# Altium PCB PCB1.PcbDoc
Units mil, origin at the board's own origin, x right, y up, seen from the top; angles counter-clockwise.
Board outline 6000 x 4000 mil, 2 copper layers (Top Layer, Bottom Layer); 35 components, 58 nets, 174 pads, 0 vias.
Unrouted connection lines stored in the file: 95.
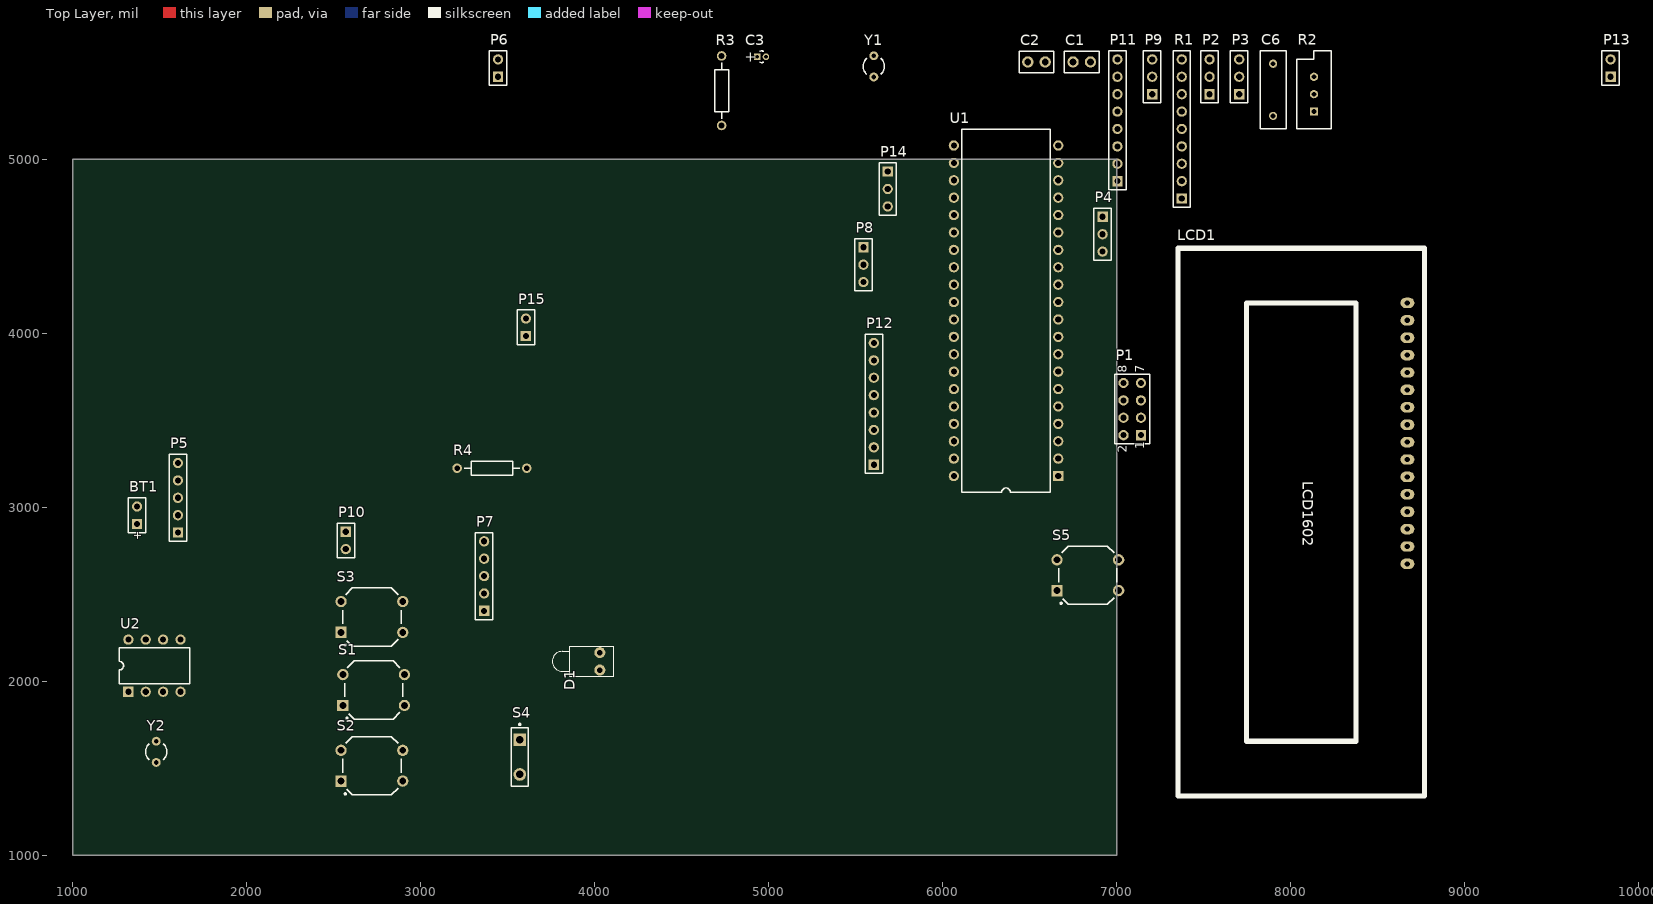
[diagram p0: Top Layer view]
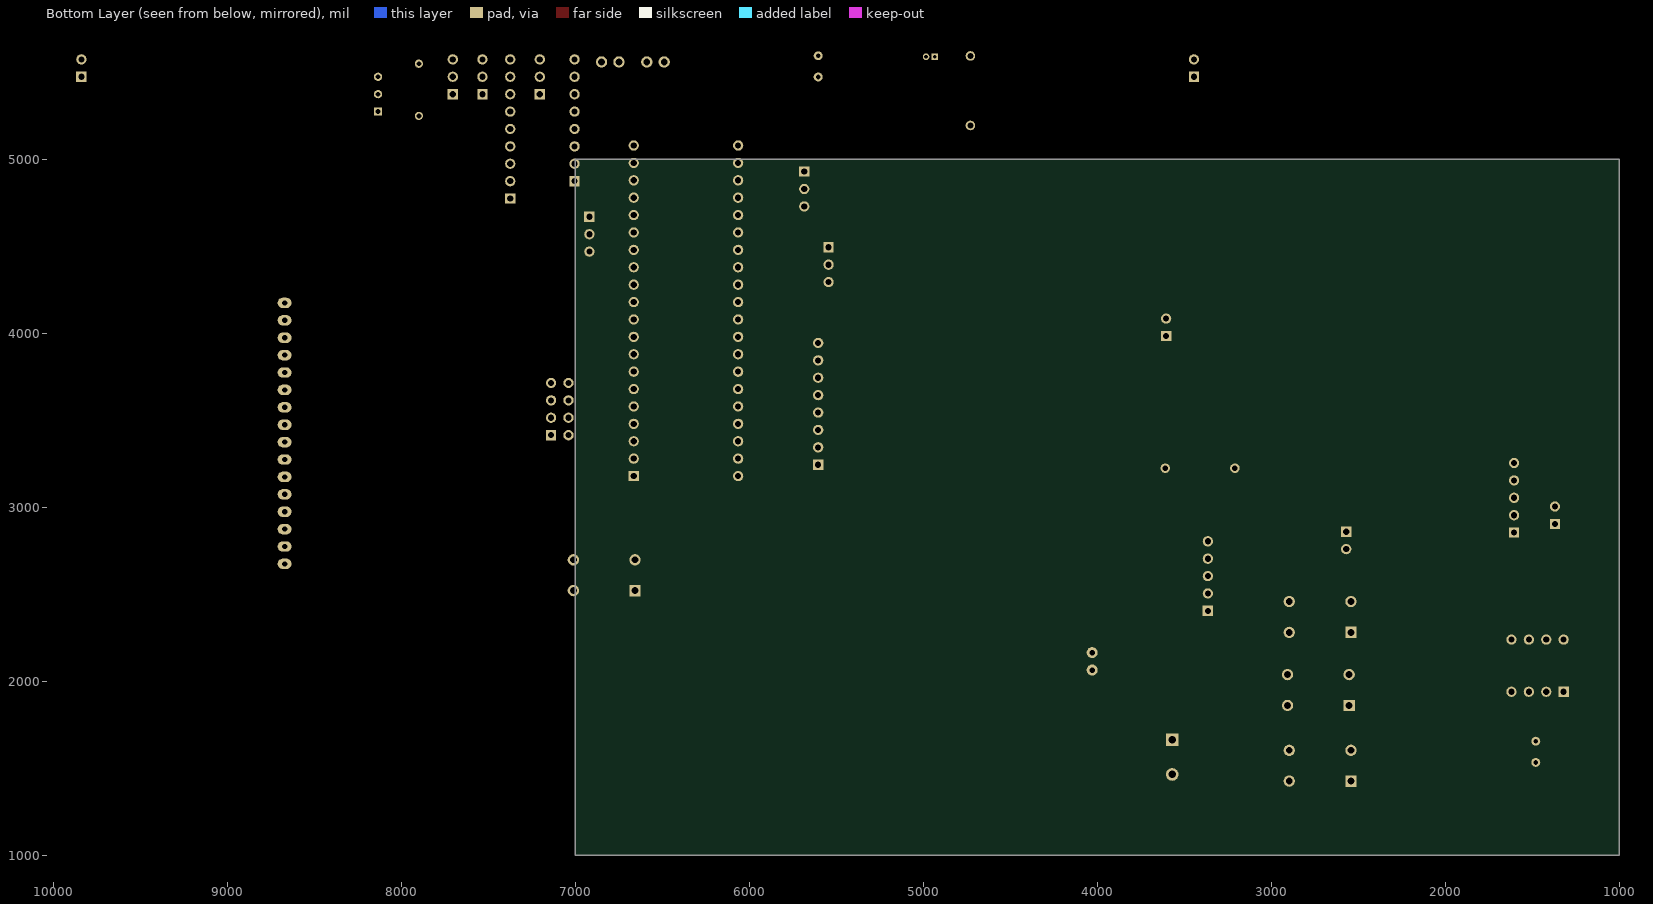
[diagram p1: Bottom Layer view, seen from below]

## Layer stack, top to bottom
Top Layer: signal copper 1.4
Dielectric: dielectric 12.6, FR-4, Dk 4.8
Bottom Layer: signal copper 1.4

## Board outline
1000,1000 7000,1000 7000,5000 1000,5000

## Design rules (kind name [scope] priority, off if disabled: settings)
Clearance [All] p1: gap=10
PolygonConnect [All] p1: connectstyle=Relief reliefconductorwidth=10 reliefentries=4 polygonreliefangle="90 Angle"
RoutingVias [All] p1: holewidth=28 width=50 viastyle="Through Hole" minholewidth=28 minwidth=50 maxholewidth=28 maxwidth=50
SilkscreenOverComponentPads [All] p1: minsilkscreentomaskgap=10
SolderMaskExpansion [All] p1: expansion=4
Width [All] p1: maxlimit=10 minlimit=10 preferedwidth=10
27 further rules are at their usual default settings.

## Components (designator, comment, footprint, x,y, rotation, side; value= is the part's Value field where it differs from the comment)
BT1 "Battery" BAT-2 1370,2955 r90 top
C1 "Cap" CAPR2.54-5.1x3.2 6800,5560 r0 top
C2 "Cap" CAPR2.54-5.1x3.2 6540,5560 r0 top
C3 "Cap Pol1" CAPPR1.27-1.7x2.8 4960,5590 r0 top
C6 "Cap" RAD-0.3 7900,5400 r90 top
D1 "LED" LED-1 4030,2115 r180 top
LCD1 "LCD1602" 1602LCD 8770,4490 r270 top
P1 "Header 4X2" HDR2X4 7140,3415 r90 top
P2 "Header 3" HDR1X3 7535,5375 r90 top
P3 "Header 3" HDR1X3 7705,5375 r90 top
P4 "Header 3" HDR1X3 6920,4670 r270 top
P5 "Header 5" HDR1X5 1605,2855 r90 top
P6 "Header 2" HDR1X2 3445,5475 r90 top
P7 "Header 5" HDR1X5 3365,2405 r90 top
P8 "Header 3" HDR1X3 5545,4495 r270 top
P9 "Header 3" HDR1X3 7205,5375 r90 top
P10 "Header 2" HDR1X2 2570,2860 r270 top
P11 "Header 8" HDR1X8 7005,4875 r90 top
P12 "Header 8" HDR1X8 5605,3245 r90 top
P13 "Header 2" HDR1X2 9840,5475 r90 top
P14 "Header 3" HDR1X3 5685,4930 r270 top
P15 "Header 2" HDR1X2 3605,3985 r90 top
R1 "res-p" HDR1X9 7375,4775 r90 top
R2 "RPot" VR5 8135,5375 r90 top
R3 "Res2" AXIAL-0.4 4730,5395 r90 top
R4 "Res2" AXIAL-0.4 3410,3225 r180 top
S1 "SW" SW/PB-V4/H7.1 2730,1950 r0 top
S2 "SW" SW/PB-V4/H7.1 2720,1515 r0 top
S3 "SW" SW/PB-V4/H7.1 2720,2370 r0 top
S4 "SW-SPST" SPST-2 3570,1565 r270 top
S5 "SW-PB" SW/PB-V4/H7.1 6835,2610 r0 top
U1 "P89C51X2BN" SOT129-1 6365,4130 r90 top
U2 "DS1302" DIP8 1470,2090 r0 top
Y1 "XTAL" BCY-W2/D3.1 5605,5535 r0 top
Y2 "XTAL" BCY-W2/D3.1 1480,1595 r0 top

## Footprints (in the part's own frame and the unit in brackets; to place one, negate y for a bottom-side part, rotate by r counter-clockwise, add the part's x,y. Pads: shape width x height; smd on the part's side, far side on the other; paste and mask are expansions set on the pad)
1602LCD [mil] "LCD module 16*2 c"
  oval 60x80 hole 30: 1(314.96,-98.43) 2(414.96,-98.43) 3(514.96,-98.43) 4(614.96,-98.43) 5(714.96,-98.43) 6(814.96,-98.43) 7(914.96,-98.43) 8(1014.96,-98.43) 9(1114.96,-98.43) 10(1214.96,-98.43) 11(1314.96,-98.43) 12(1414.96,-98.43) 13(1514.96,-98.43) 14(1614.96,-98.43) 15(1714.96,-98.43) 16(1814.96,-98.43)
  silkscreen extent 0,-1417 3150,0
AXIAL-0.4 [mm] "Resistor; 2 Le"
  round 1.4 hole 0.85: 1(-5.08,0) 2(5.08,0)
  silkscreen extent -4.06,-1.02 4.06,1.02
BAT-2 [mm] "Multicell Battery; 2 Le"
  rect 1.5x1.5 hole 0.9: 1(-1.27,0)
  round 1.5 hole 0.9: 2(1.27,0)
  silkscreen extent -2.54,-1.27 2.54,1.27
BCY-W2/D3.1 [mm] "Crystal, Thru-Hole; 2 Leads; Body 3.1 x 8.2 mm (Dia."
  round 1.3 hole 0.7: 1(0,1.55) 2(0,-1.55)
  silkscreen extent -1.55,-1.19 1.55,1.17
CAPPR1.27-1.7x2.8 [mm] "Capacitor, Radial, Tantalum; Body 1.7 x 2.8 mm (Dia.xH max); Pin Spacing 1.27 mm (t"
  rect 0.95x0.95 hole 0.55: 1(-0.635,0)
  round 0.95 hole 0.55: 2(0.635,0)
  silkscreen extent -0.29,-0.85 0.29,0.85
CAPR2.54-5.1x3.2 [mm] "Capacitor, Ceramic, Thru-Hole, Dipped Radial; Body 5.1 x 3.2 mm (WxT) Pin Spacing 2.54 mm (t"
  round 1.65 hole 1: 1(-1.27,0) 2(1.27,0)
  silkscreen extent -2.55,-1.6 2.55,1.6
DIP8 [mm] "DIP; 8 Leads; Row Spacing 7.62 mm; Pitch 2.54"
  rect 1.5x1.5 hole 0.9: 1(-3.81,-3.81)
  round 1.5 hole 0.9: 2(-1.27,-3.81) 3(1.27,-3.81) 4(3.81,-3.81) 5(3.81,3.81) 6(1.27,3.81) 7(-1.27,3.81) 8(-3.81,3.81)
  silkscreen extent -5.15,-2.65 5.15,2.65
HDR1X2 [mm] "Connector; Header; 2 Posit"
  rect 1.5x1.5 hole 0.9: 1(0,0)
  round 1.5 hole 0.9: 2(2.54,0)
  silkscreen extent -1.27,-1.27 3.81,1.27
HDR1X3 [mm] "Connector; Header; 3 Posit"
  rect 1.5x1.5 hole 0.9: 1(0,0)
  round 1.5 hole 0.9: 2(2.54,0) 3(5.08,0)
  silkscreen extent -1.27,-1.27 6.35,1.27
HDR1X5 [mm] "Connector; Header; 5 Posit"
  rect 1.5x1.5 hole 0.9: 1(0,0)
  round 1.5 hole 0.9: 2(2.54,0) 3(5.08,0) 4(7.62,0) 5(10.16,0)
  silkscreen extent -1.27,-1.27 11.43,1.27
HDR1X8 [mm] "Connector; Header; 8 Posit"
  rect 1.5x1.5 hole 0.9: 1(0,0)
  round 1.5 hole 0.9: 2(2.54,0) 3(5.08,0) 4(7.62,0) 5(10.16,0) 6(12.7,0) 7(15.24,0) 8(17.78,0)
  silkscreen extent -1.27,-1.27 19.05,1.27
HDR1X9 [mm] "Connector; Header; 9"
  rect 1.5x1.5 hole 0.9: 1(0,0)
  round 1.5 hole 0.9: 2(2.54,0) 3(5.08,0) 4(7.62,0) 5(10.16,0) 6(12.7,0) 7(15.24,0) 8(17.78,0) 9(20.32,0)
  silkscreen extent -1.27,-1.27 21.59,1.27
HDR2X4 [mm] "Connector; Header; 4x2 Posit"
  rect 1.5x1.5 hole 0.9: 1(0,0)
  round 1.5 hole 0.9: 2(0,2.54) 3(2.54,0) 4(2.54,2.54) 5(5.08,0) 6(5.08,2.54) 7(7.62,0) 8(7.62,2.54)
  silkscreen extent -1.27,-1.27 8.89,3.81
LED-1 [mm] "Typical RED GaAs LED"
  round 1.6 hole 0.8: 1(0,1.27) 2(0,-1.27)
  silkscreen extent -2,-2.2 6.95,2.2
RAD-0.3 [mm] "Capacitor; 2 Le"
  round 1.2 hole 0.7: 1(-3.81,0) 2(3.81,0)
  silkscreen extent -5.71,-1.91 5.71,1.91
SOT129-1 [mm] "DIP, Plastic; 40 Leads; Row Spacing 15.24 mm; Pitch 2.54"
  rect 1.5x1.5 hole 0.9: 1(-24.13,-7.62)
  round 1.5 hole 0.9: 2(-21.59,-7.62) 3(-19.05,-7.62) 4(-16.51,-7.62) 5(-13.97,-7.62) 6(-11.43,-7.62) 7(-8.89,-7.62) 8(-6.35,-7.62) 9(-3.81,-7.62) 10(-1.27,-7.62) 11(1.27,-7.62) 12(3.81,-7.62) 13(6.35,-7.62) 14(8.89,-7.62) 15(11.43,-7.62) 16(13.97,-7.62) 17(16.51,-7.62) 18(19.05,-7.62) 19(21.59,-7.62) 20(24.13,-7.62) 21(24.13,7.62) 22(21.59,7.62) 23(19.05,7.62) 24(16.51,7.62) 25(13.97,7.62) 26(11.43,7.62) 27(8.89,7.62) 28(6.35,7.62) 29(3.81,7.62) 30(1.27,7.62) 31(-1.27,7.62) 32(-3.81,7.62) 33(-6.35,7.62) 34(-8.89,7.62) 35(-11.43,7.62) 36(-13.97,7.62) 37(-16.51,7.62) 38(-19.05,7.62) 39(-21.59,7.62) 40(-24.13,7.62)
  silkscreen extent -26.5,-6.45 26.5,6.45
SPST-2 [mm] "Circuit Breaker; 2 Le"
  rect 1.85x1.85 hole 1.1: 1(-2.54,0)
  round 1.85 hole 1.1: 2(2.54,0)
  silkscreen extent -4.89,-1.27 4.28,1.27
SW/PB-V4/H7.1 [mm] "Switch, Push Button, Thru-Hole; 4 Leads; Body 8.5 x 8.5 mm (LxW typ); Row Spacing 9.0 mm; Pit"
  rect 1.65x1.65 hole 1: 1(-4.5,-2.25)
  round 1.65 hole 1: 2(4.5,-2.25) 3(-4.5,2.25) 4(4.5,2.25)
  silkscreen extent -4.25,-4.25 4.25,4.25
VR5 [mm] "Potentiometer; 3 Le"
  rect 1.2x1.2 hole 0.7: 1(-2.54,0)
  round 1.2 hole 0.7: 2(0,0) 3(2.54,0)
  silkscreen extent -5.08,-2.54 6.35,2.54

## Part data
BT1: "Multicell Battery"
C1 C2 C6: "Capacitor"
C3: "Polarized Capacitor (Radial)"
P1: "Header, 4-Pin, Dual row"
P2 P3 P4 P8 P9 P14: "Header, 3-Pin"
P5 P7: "Header, 5-Pin"
P6 P10 P13 P15: "Header, 2-Pin"
P11 P12: "Header, 8-Pin"
R2: "Potentiometer"
R3 R4: "Resistor"
S1 S2 S3: library part SWITCH
S4: "Single-Pole, Single-Throw Switch"
S5: "Switch"
U1: "80C51 8-Bit Flash Microcontroller Family, 4 kB Flash"
U2: "Trickle Charge Timekeeping Chip"
Y1 Y2: "Crystal Oscillator"

## Nets (pads, with @x,y where several pads share a name; then routed paths per layer and width w, separated by ;. In a path a pad name is that pad's centre, name@x,y a point inside that pad or via, vN(x,y) a via of type N, cw(c..) or ccw(c..) an arc to the next point about the centre after c; other vN are vias at no path point)
GND: C1.2 C2.2 C6.2 LCD1.1 P1.7 P1.8 P3.1 P3.2 P3.3 P15.2 R3.2 U1.20
MC: P15.1 U1.12
NetBT1_2: BT1.2 P5.5 U2.4
NetC1_1: C1.1 U1.19 Y1.2
NetC2_1: C2.1 U1.18 Y1.1
NetC3_2: C3.2 R3.1
NetD1_1: D1.1 R4.1
NetD1_2: D1.2 P7.2
NetLCD1_2: LCD1.2 LCD1.15 P13.2 R1.1 R2.2
NetLCD1_3: LCD1.3 R2.3
NetLCD1_4: LCD1.4 P9.3
NetLCD1_5: LCD1.5 P9.2
NetLCD1_6: LCD1.6 P9.1
NetLCD1_7: LCD1.7 P11.1 R1.9
NetLCD1_8: LCD1.8 P11.2 R1.8
NetLCD1_9: LCD1.9 P11.3 R1.7
NetLCD1_10: LCD1.10 P11.4 R1.6
NetLCD1_11: LCD1.11 P11.5 R1.5
NetLCD1_12: LCD1.12 P11.6 R1.4
NetLCD1_13: LCD1.13 P11.7 R1.3
NetLCD1_14: LCD1.14 P11.8 R1.2
NetLCD1_16: LCD1.16 P13.1 R2.1
NetP4_1: P4.1 U1.16
NetP4_2: P4.2 U1.15
NetP4_3: P4.3 U1.14
NetP5_1: P5.1 U2.5
NetP5_2: P5.2 U2.7
NetP5_3: P5.3 U2.1
NetP5_4: P5.4 U2.6
NetP6_1: P6.1 U1.1
NetP6_2: P6.2 U1.2
NetP7_1: P7.1 S4.1
NetP7_3: P7.3 S1.2
NetP7_4: P7.4 S2.2
NetP7_5: P7.5 S3.2
NetP8_1: P8.1 U1.26
NetP8_2: P8.2 U1.27
NetP8_3: P8.3 U1.28
NetP10_1: P10.1 S1.1 S2.1 S3.1 S4.2
NetP10_2: P10.2 R4.2
NetP12_1: P12.1 U1.39
NetP12_2: P12.2 U1.38
NetP12_3: P12.3 U1.37
NetP12_4: P12.4 U1.36
NetP12_5: P12.5 U1.35
NetP12_6: P12.6 U1.34
NetP12_7: P12.7 U1.33
NetP12_8: P12.8 U1.32
NetP14_1: P14.1 U1.3
NetP14_2: P14.2 U1.21
NetP14_3: P14.3 U1.22
NetS5_2: S5.2 U1.9
NetU2_2: U2.2 Y2.2
NetU2_3: U2.3 Y2.1
RXD: P1.1 P1.2 U1.10
TXD: P1.3 P1.4 U1.11
VCC: C3.1 C6.1 P1.5 P1.6 P2.1 P2.2 P2.3 S5.1 U1.40
VCC1: BT1.1 U2.8
pads on no net: S1.3 S1.4 S2.3 S2.4 S3.3 S3.4 S5.3 S5.4 U1.4 U1.5 U1.6 U1.7 U1.8 U1.13 U1.17 U1.23 U1.24 U1.25 U1.29 U1.30 U1.31

## Text inside footprints (layer, text, board x,y; h text height)
BT1: Top Overlay "+" at 1392.72,2810.51 h45.28 r90
C3: Top Overlay "+" at 4862.17,5560.47 h59.06
P1: Top Overlay "8" at 7060,3775 h50 r90; Top Overlay "7" at 7160,3775 h50 r90; Top Overlay "1" at 7160,3335 h50 r90; Top Overlay "2" at 7060,3315 h50 r90